# EAGLE board Lamp Logic Board_22 BRAIN (EAGLE 9.5.1)
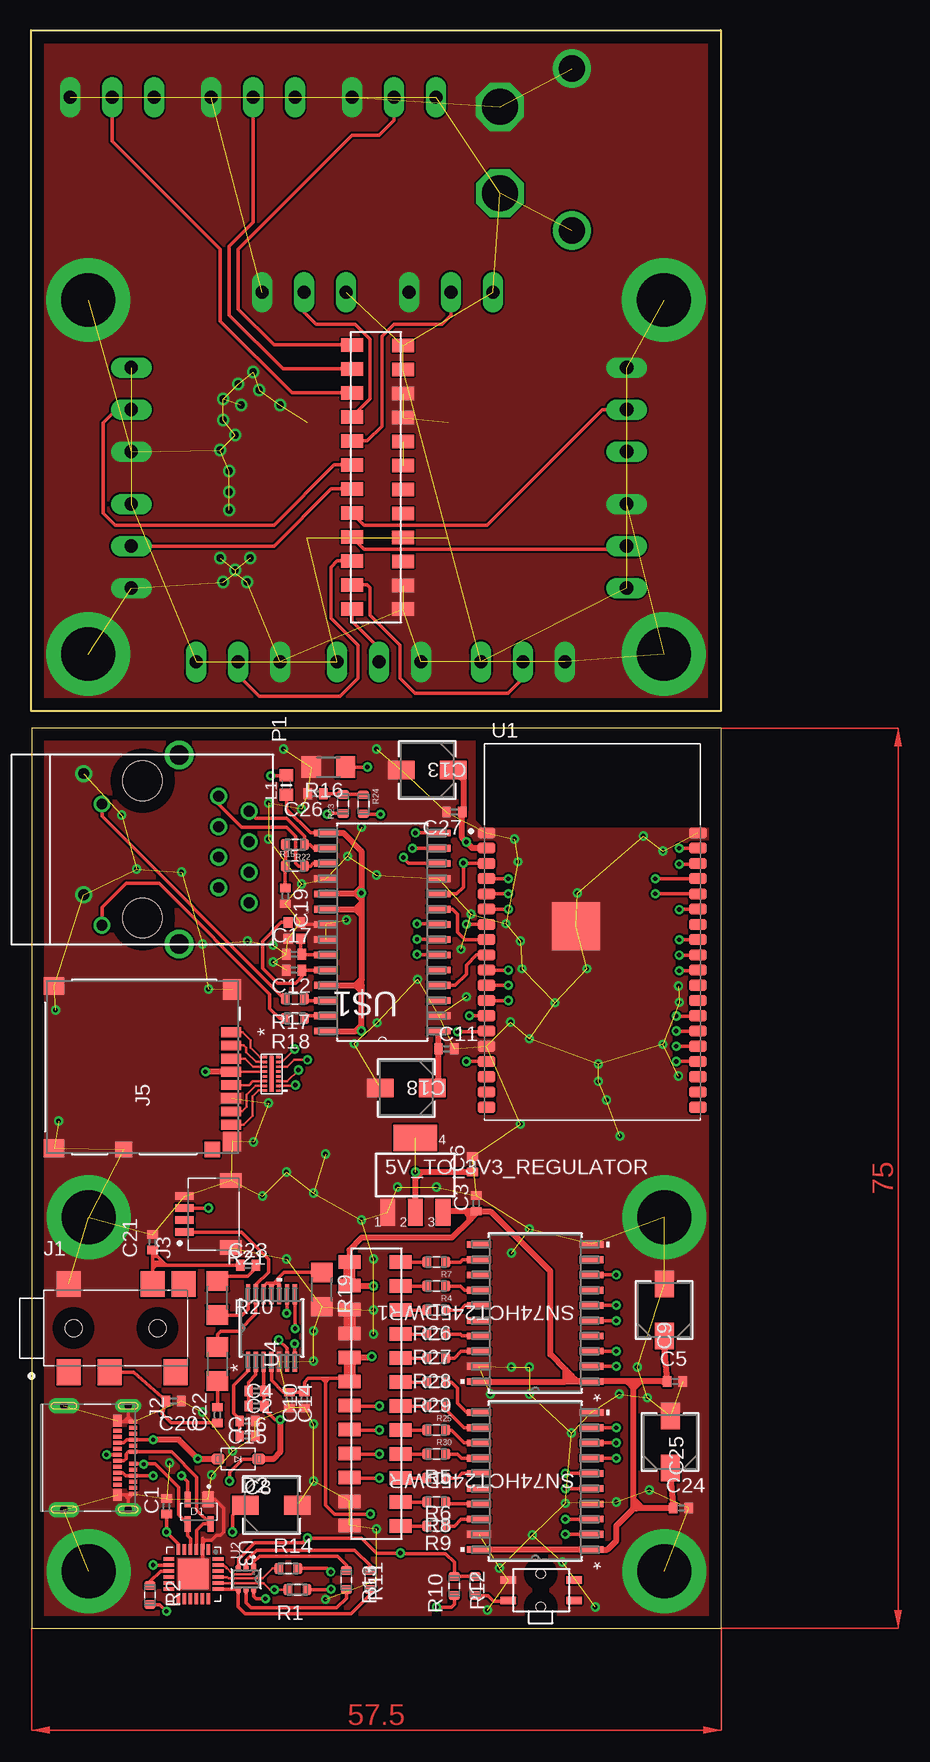
[diagram p0: board, top side]
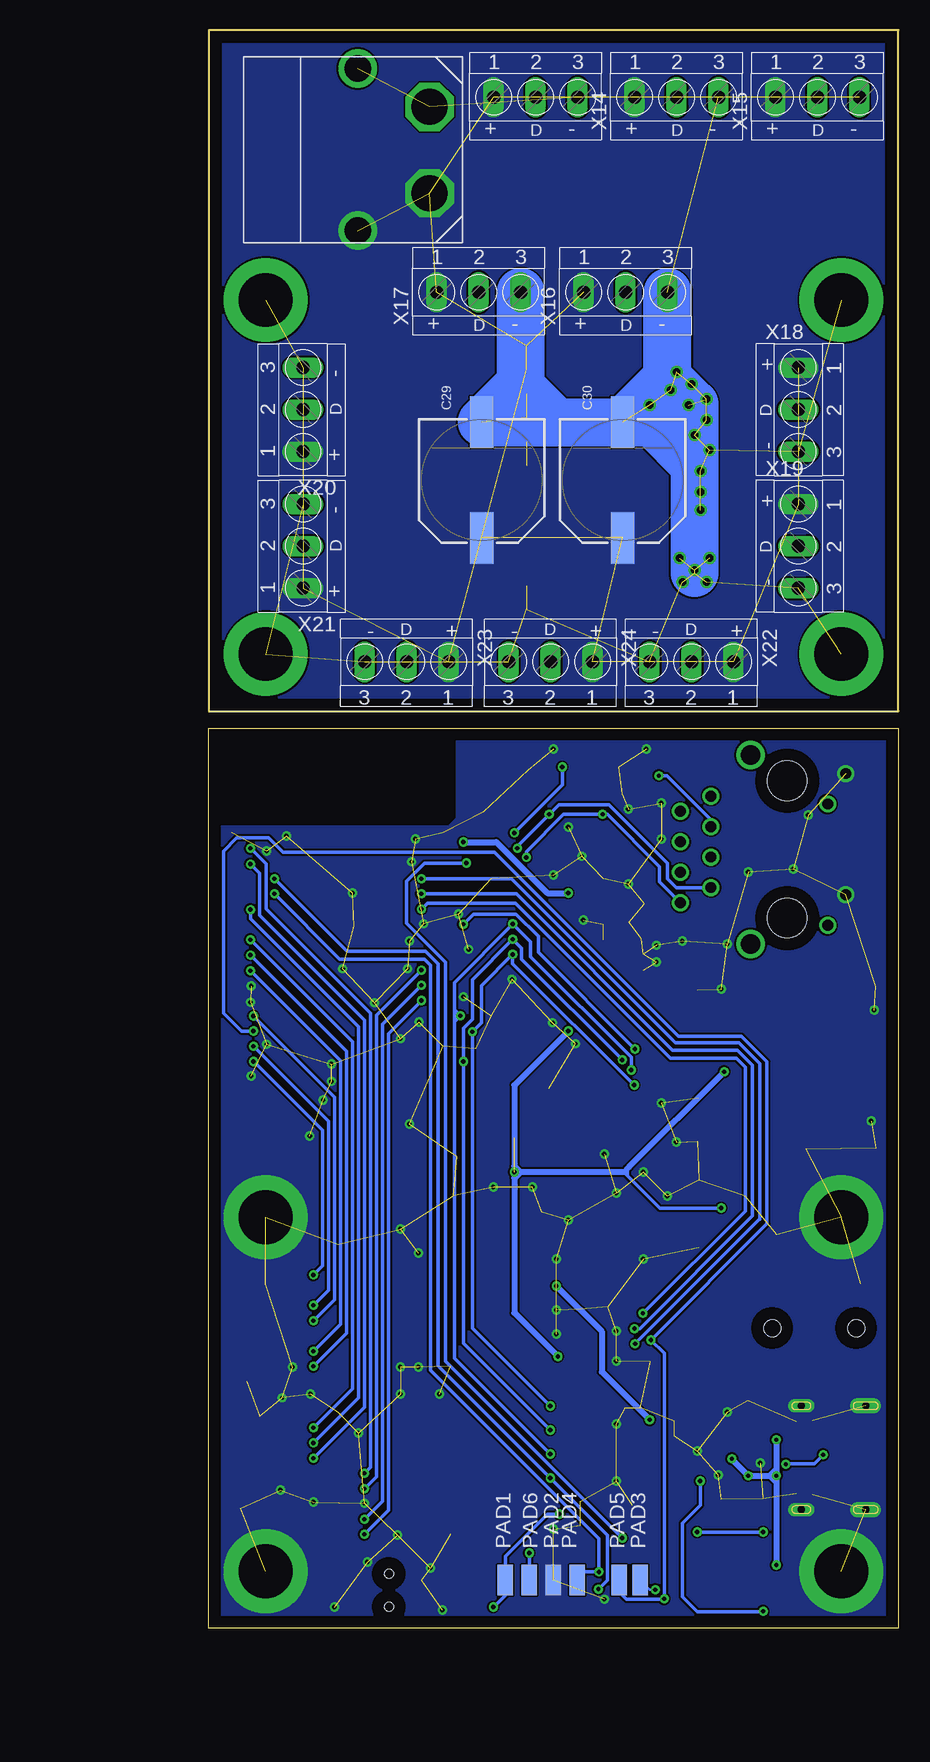
[diagram p1: board, bottom side, seen from below]

Size 57.54 x 133.17 mm. Coordinates in mm from the lower left corner, seen from the top.
Outline: 0.04,0 57.54,0 57.54,75 0.04,75 0.04,0
Outline: 0,76.42 0,133.17 57.5,133.17 57.5,76.42 0,76.42
Copper layers (1*16): Top 0.035mm / dielectric 1.5mm / Bottom 0.035mm
Design rules "default": minimum track width 6mil, minimum drill 0.35mm, track to track 6mil, track to pad 6mil, pad to pad 6mil, via to via 6mil, smd to smd 6mil, copper to edge 40mil, drill to drill 6mil, minimum pad ring 10mil, minimum via ring 8mil, stop-mask expansion 4mil, vias tented up to drill 0mil, thermal gap 10mil
Net classes: 1 LED Data: width 0.305 mm, drill 0.25 mm

## Footprints (pad centres in the part's own frame; a part is rotated, then mirrored left to right if it is on the bottom)
SOT223 = smd 1.219 x 2.235: 1 -2.311,-3.099; 2 0,-3.099; 3 2.311,-3.099 | smd 3.6 x 2.2: 4 0,3.099
C0402 = smd 0.7 x 0.9: 1 -0.65,0; 2 0.65,0
CAP_EEFC_B = smd 2.21 x 1.575: 1 -2.159,0; 2 2.159,0
CSV-G = smd 4.318 x 1.93: + -4.826,0; - 4.826,0
SOT143 = smd 0.99 x 1.3: 1 -0.76,-1.025 | smd 0.59 x 1.3: 2 0.96,-1.025; 3 0.96,1.025; 4 -0.96,1.025
SOD-123 = smd 1.02 x 0.86: A 1.68,0; C -1.68,0
CUI_SJ2-35894D-SMT-TR = smd 2 x 2.15: 1 -3.9,-3.675; 2 3.1,3.675; 3 -0.5,-3.675; 4 -3.9,3.675; 10 5.7,3.675; 11 5,-3.675 | hole 1.4: -3.5,0; 3.5,0
MOLEX_105450-0101 = smd 0.3 x 0.7: A1 -3,3.77; A2 -2.5,3.77; A3 -2,3.77; A4 -1.5,3.77; A5 -1,3.77; A6 -0.5,3.77; A7 0.5,3.77; A8 1,3.77; A9 1.5,3.77; A10 2,3.77; A11 2.5,3.77; A12 3,3.77; B2 2.25,2.47; B3 1.75,2.47; B4 1.25,2.47; B5 0.75,2.47; B6 0.25,2.47; B7 -0.25,2.47; B8 -0.75,2.47; B9 -1.25,2.47; B10 -1.75,2.47; B11 -2.25,2.47 | smd 1 x 0.7: B1 3.1,2.47; B12 -3.1,2.47 | drill 0.6 pad 1.1 long: S1 -4.32,3.36; S2 4.32,3.36 | drill 0.6 pad 1.3 long: S3 -4.32,-2; S4 4.32,-2
JST_SM04B-SRSS-TB(LF)(SN) = smd 0.6 x 1.55: 1 -1.5,0; 2 -0.5,0; 3 0.5,0; 4 1.5,0 | smd 1.2 x 1.8: S1 -2.8,-3.875; S2 2.8,-3.875
CON00218_8 = smd 0.813 x 1.676: 1 2.899,-7.387; 2 1.799,-7.387; 3 0.699,-7.387; 4 -0.401,-7.387; 5 -1.501,-7.387; 6 -2.601,-7.387; 7 -3.701,-7.387; 8 -4.801,-7.387 | smd 1.499 x 1.702: 9 -6.751,7.374; 10 6.751,7.374 | smd 1.295 x 1.397: 11 -6.859,1.577 | smd 1.295 x 1.295: 12 -6.859,-5.823 | smd 1.6 x 1.499: 13 -6.201,-7.476 | smd 1.702 x 1.499: 14 6.449,-7.476
L0603 = smd 1 x 1.1: 1 -0.794,0; 2 0.794,0
WIZNET_RB1-125BAG1A = drill 0.9: L1 6.325,-3.38; L2 3.784,-4.899; L3 -3.786,-3.379; L4 -6.325,-4.9 | drill 0.9 pad 1.3: R1 -4.446,6.349; R2 -3.176,8.889; R3 -1.906,6.349; R4 -0.636,8.889; R5 0.634,6.349; R6 1.904,8.889; R7 3.174,6.349; R8 4.444,8.889 | drill 1.6 pad 2.184: S1 -7.876,3.049; S2 7.874,3.049 | hole 3.3: 5.714,-0.001; -5.716,-0.001
SMD1,27-2,54 = smd 1.27 x 2.54: 1 0,0
RES_0603 = smd 0.74 x 0.93: 1 -0.795,0; 2 0.795,0
R1206 = smd 1.6 x 1.803: 1 -1.422,0; 2 1.422,0
DW20 = smd 1.981 x 0.559: 1 -4.686,5.715; 2 -4.686,4.445; 3 -4.686,3.175; 4 -4.686,1.905; 5 -4.686,0.635; 6 -4.686,-0.635; 7 -4.686,-1.905; 8 -4.686,-3.175; 9 -4.686,-4.445; 10 -4.686,-5.715; 11 4.686,-5.715; 12 4.686,-4.445; 13 4.686,-3.175; 14 4.686,-1.905; 15 4.686,-0.635; 16 4.686,0.635; 17 4.686,1.905; 18 4.686,3.175; 19 4.686,4.445; 20 4.686,5.715
XCVR_ESP32-WROVER-I = smd 1.45 x 0.93: 1 -8.81,8.26; 2 -8.81,6.99; 3 -8.81,5.72; 4 -8.81,4.45; 5 -8.81,3.18; 6 -8.81,1.91; 7 -8.81,0.64; 8 -8.81,-0.63; 9 -8.81,-1.9; 10 -8.81,-3.17; 11 -8.81,-4.44; 12 -8.81,-5.71; 13 -8.81,-6.98; 14 -8.81,-8.25; 15 -8.81,-9.52; 16 -8.81,-10.79; 17 -8.81,-12.06; 18 -8.81,-13.33; 19 -8.81,-14.6; 20 8.81,-14.6; 21 8.81,-13.33; 22 8.81,-12.06; 23 8.81,-10.79; 24 8.81,-9.52; 25 8.81,-8.25; 26 8.81,-6.98; 27 8.81,-5.71; 28 8.81,-4.44; 29 8.81,-3.17; 30 8.81,-1.9; 31 8.81,-0.63; 32 8.81,0.64; 33 8.81,1.91; 34 8.81,3.18; 35 8.81,4.45; 36 8.81,5.72; 37 8.81,6.99; 38 8.81,8.26 | smd 4 x 4: 39 -1.38,0.47
SILABS_CP2102N-A02-GQFN24R = smd 0.9 x 0.3: 1 -1.55,1.75; 2 -1.55,1.25; 3 -1.55,0.75; 4 -1.55,0.25; 5 -1.55,-0.25; 6 -1.55,-0.75; 13 2.55,-0.75; 14 2.55,-0.25; 15 2.55,0.25; 16 2.55,0.75; 17 2.55,1.25; 18 2.55,1.75 | smd 0.3 x 0.9: 7 -0.75,-1.55; 8 -0.25,-1.55; 9 0.25,-1.55; 10 0.75,-1.55; 11 1.25,-1.55; 12 1.75,-1.55; 19 1.75,2.55; 20 1.25,2.55; 21 0.75,2.55; 22 0.25,2.55; 23 -0.25,2.55; 24 -0.75,2.55 | smd 2.55 x 2.55: 25 0.5,0.5
SOT-363 = smd 0.6 x 0.42: 1 -0.95,0.65; 2 -0.95,0; 3 -0.95,-0.65; 4 0.95,-0.65; 5 0.95,0; 6 0.95,0.65
PW14 = smd 1.676 x 0.356: 1 -2.819,1.95; 2 -2.819,1.3; 3 -2.819,0.65; 4 -2.819,0; 5 -2.819,-0.65; 6 -2.819,-1.3; 7 -2.819,-1.95; 8 2.819,-1.95; 9 2.819,-1.3; 10 2.819,-0.65; 11 2.819,0; 12 2.819,0.65; 13 2.819,1.3; 14 2.819,1.95
SOIC127P1034X264-28N = smd 1.981 x 0.559: 1 -4.699,8.255; 2 -4.699,6.985; 3 -4.699,5.715; 4 -4.699,4.445; 5 -4.699,3.175; 6 -4.699,1.905; 7 -4.699,0.635; 8 -4.699,-0.635; 9 -4.699,-1.905; 10 -4.699,-3.175; 11 -4.699,-4.445; 12 -4.699,-5.715; 13 -4.699,-6.985; 14 -4.699,-8.255; 15 4.699,-8.255; 16 4.699,-6.985; 17 4.699,-5.715; 18 4.699,-4.445; 19 4.699,-3.175; 20 4.699,-1.905; 21 4.699,-0.635; 22 4.699,0.635; 23 4.699,1.905; 24 4.699,3.175; 25 4.699,4.445; 26 4.699,5.715; 27 4.699,6.985; 28 4.699,8.255
CM1624-08DE = smd 0.2 x 0.4: CLK 1.075,1.3; CMD 2.275,1.3; DATA0 0.675,1.3; DATA1 0.3,1.3; DATA2 3.075,1.3; DATA3 2.675,1.3; ESD1 1.475,1.3; ESD2 1.475,0.175; ESD3 1.875,0.175; SDCLK 1.075,0.175; SDCMD 2.275,0.175; SDDATA0 0.675,0.175; SDDATA1 0.275,0.175; SDDATA2 3.075,0.175; SDDATA3 2.675,0.175; VCC 1.875,1.3 | smd 3 x 0.35: GND 1.7,0.725
ECS-250-10-37B-CTN-TR = smd 0.85 x 0.75: 1 0.45,0.4; 2 1.8,0.4; 3 1.8,1.45; 4 0.45,1.45
QUICKFIT_RISER_THING = drill 4.5 pad 7: P$1 0,0
TL1014BF160QG = smd 1.27 x 0.635: P$1 0,0; P$2 5.5,0; P$3 0,-1.7; P$4 5.5,-1.7 | hole 0.75: 2.7,0.525; 2.7,-2.225
MY_HEADER = smd 1.12 x 1.83: P$1 -2,0; P$2 0.005,0; P$3 2.005,0; P$4 4.005,0; P$5 6.005,0; P$6 8.005,0; P$7 10.005,0; P$8 12.005,0; P$9 14.005,0; P$10 16.005,0; P$11 18.005,0; P$12 20.005,0; P$13 -2,-4.25; P$14 -0.045,-4.25; P$15 1.955,-4.25; P$16 3.955,-4.25; P$17 5.955,-4.25; P$18 7.955,-4.25; P$19 9.955,-4.25; P$20 11.955,-4.25; P$21 13.955,-4.25; P$22 15.955,-4.25; P$23 17.955,-4.25; P$24 19.955,-4.25
4,PIECE = drill 4.5 pad 7: P$1 0,0; P$2 48,29.5; P$3 0,29.5; P$4 48,0
XT60 = drill 3 octagon: + 4.1,2.75; - 11.3,2.75 | drill 2.184 pad 2.438: +_HOLE 1,8.75 | drill 2.184 pad 2.413: -_HOLE 14.5,8.75
TERMINAL-BLOCK-3-PIN-3.5MM-LONG-PAD = drill 1.1 pad 1.7 long: 1 -3.5,-0.1; 2 0,-0.1; 3 3.5,-0.1

## Placement (x,y rotation side)
5V_TO_3V3_REGULATOR  [SOT223]  32.04,37.75 0 top
C1  0.1uF  [C0402]  11.29,10.14 90 top
C2  1uF  [C0402]  18.79,18.5 0 top
C3  1uF  [C0402]  37.11,35.38 90 top
C4  0.1uF  [C0402]  18.79,19.75 0 top
C5  0.1uF  [C0402]  53.69,20.55 0 top
C6  1uF  [C0402]  36.8,38.63 90 top
C8  1uF  [CAP_EEFC_B]  20.04,10.25 0 top
C9  1uF  [CAP_EEFC_B]  52.79,26.5 90 top
C10  1uF  [C0402]  21.54,19 270 top
C11  10uF  [C0402]  34.62,48.26 0 top
C12  6pF  [C0402]  21.93,54.83 180 top
C13  100uF  [CAP_EEFC_B]  33.04,71.5 180 top
C14  0.1uF  [C0402]  22.79,19 270 top
C15  1uF  [C0402]  18.04,16 180 top
C16  0.1uF  [C0402]  18.04,17.25 180 top
C17  6pF  [C0402]  21.93,56.14 180 top
C18  100uF  [CAP_EEFC_B]  31.29,45 180 top
C19  0.1uF  [C0402]  21.19,61.01 270 top
C20  0.1uF  [C0402]  11.9,18.92 0 top
C21  0.1uF  [C0402]  10.13,32.14 90 top
C22  1uF  [C0402]  15.54,17.75 90 top
C23  1uF  [C0402]  18.09,30.22 0 top
C24  0.1uF  [C0402]  54.19,10 0 top
C25  1uF  [CAP_EEFC_B]  53.29,15.5 90 top
C26  0.1uF  [C0402]  23.71,69.53 180 top
C27  1uF  [C0402]  35.29,68 180 top
C29  [CSV-G]  34.75,95.67 90 bottom
C30  [CSV-G]  23,95.67 90 bottom
D1  SP0503BAHTG  [SOT143]  14,9.7 180 top
D2  STPS1L60ZFY  [SOD-123]  17.27,14.08 180 top
J1  SJ2-35894D-SMT-TR  [CUI_SJ2-35894D-SMT-TR]  7.04,25 0 top
J2  105450-0101  [MOLEX_105450-0101]  4.74,14.19 270 top
J3  SM04B-SRSS-TB(LF)(SN)  [JST_SM04B-SRSS-TB(LF)(SN)]  12.79,34.5 90 top
J5  LLC  [CON00218_8]  9.29,46.75 90 top
L1  EXC3BP  [L0603]  21.29,70.25 90 top
P1  RB1-125BAG1A  [WIZNET_RB1-125BAG1A]  9.29,64.88 270 top
PAD1  VCC  [SMD1,27-2,54]  32.79,4 0 bottom
PAD2  GND  [SMD1,27-2,54]  28.79,4 0 bottom
PAD3  TX  [SMD1,27-2,54]  21.54,4 0 bottom
PAD4  RX  [SMD1,27-2,54]  26.79,4 0 bottom
PAD5  DTR  [SMD1,27-2,54]  23.29,4 0 bottom
PAD6  RTS  [SMD1,27-2,54]  30.79,4 0 bottom
R1  330  [RES_0603]  22.21,3.2 180 top
R2  12k  [RES_0603]  9.91,2.75 270 top
R4  330  [RES_0603]  33.79,28.5 180 top
R5  330  [RES_0603]  33.79,14.5 180 top
R6  330  [RES_0603]  33.79,12.5 180 top
R7  330  [RES_0603]  33.79,30.5 180 top
R8  330  [RES_0603]  33.79,10.5 180 top
R9  330  [RES_0603]  33.79,8.5 180 top
R10  330  [RES_0603]  37.04,3.5 270 top
R11  12k  [RES_0603]  28.29,4 270 top
R12  12k  [RES_0603]  35.29,3.5 270 top
R13  12k  [RES_0603]  26.29,4 270 top
R14  330  [RES_0603]  21.45,4.97 0 top
R15  330  [RES_0603]  22.01,63.5 0 top
R16  2.32k  [R1206]  24.79,71.75 180 top
R17  330  [RES_0603]  22,52.44 180 top
R18  330  [RES_0603]  22,50.8 180 top
R19  10k  [R1206]  24.24,28.2 270 top
R20  75  [R1206]  15.54,22 90 top
R21  75  [R1206]  15.54,27.5 270 top
R22  330  [RES_0603]  22.01,65.28 180 top
R23  330  [RES_0603]  26.01,68.68 90 top
R24  330  [RES_0603]  27.71,68.65 270 top
R25  330  [RES_0603]  33.79,18.5 180 top
R26  330  [RES_0603]  33.79,26.5 180 top
R27  330  [RES_0603]  33.79,24.5 180 top
R28  330  [RES_0603]  33.79,22.5 180 top
R29  330  [RES_0603]  33.79,20.5 180 top
R30  330  [RES_0603]  33.79,16.5 180 top
SN74HCT245DWR  SN74HCT245DWR  [DW20]  42.04,12.25 180 top
SN74HCT245DWR1  SN74HCT245DWR  [DW20]  42.04,26.25 180 top
U1  ESP32-WROVER-IB  [XCVR_ESP32-WROVER-I]  46.79,58 0 top
U2  CP2102N-A02-GQFN24R  [SILABS_CP2102N-A02-GQFN24R]  13.04,5 270 top
U3  MMDT3904-7-F  [SOT-363]  17.92,4.09 270 top
U4  PCM1808PWR  [PW14]  20.04,25 90 top
U$1  ENC28J60/SO  [SOIC127P1034X264-28N]  29.29,58 180 top
U$2  CM1624-08DE  [CM1624-08DE]  20.79,44.5 90 top
U$3  ECS-250-10-37B-CTN-TR  [ECS-250-10-37B-CTN-TR]  21.04,59.25 270 top
U$4  QUICKFIT_RISER_THING  [QUICKFIT_RISER_THING]  4.79,4.75 0 top
U$5  QUICKFIT_RISER_THING  [QUICKFIT_RISER_THING]  4.79,34.25 0 top
U$6  QUICKFIT_RISER_THING  [QUICKFIT_RISER_THING]  52.79,34.25 0 top
U$7  TL1014BF160QG  [TL1014BF160QG]  39.79,4 0 top
U$8  QUICKFIT_RISER_THING  [QUICKFIT_RISER_THING]  52.79,4.75 0 top
U$9  MY_HEADER  [MY_HEADER]  30.79,28.5 270 top
U$13  POWERBOARD_TEMPLATEPOWERBOARD_TEMPLATE  [4,PIECE]  52.75,81.17 0 bottom
U$14  MY_HEADER  [MY_HEADER]  26.75,86.92 90 top
U$15  XT60  [XT60]  36.34,115.46 90 bottom
X13  TERMINAL-BLOCK-3.5MM-3-PIN-LONG-PAD  [TERMINAL-BLOCK-3-PIN-3.5MM-LONG-PAD]  30.25,127.67 0 bottom
X14  TERMINAL-BLOCK-3.5MM-3-PIN-LONG-PAD  [TERMINAL-BLOCK-3-PIN-3.5MM-LONG-PAD]  18.5,127.67 0 bottom
X15  TERMINAL-BLOCK-3.5MM-3-PIN-LONG-PAD  [TERMINAL-BLOCK-3-PIN-3.5MM-LONG-PAD]  6.75,127.67 0 bottom
X16  TERMINAL-BLOCK-3.5MM-3-PIN-LONG-PAD  [TERMINAL-BLOCK-3-PIN-3.5MM-LONG-PAD]  22.75,111.42 0 bottom
X17  TERMINAL-BLOCK-3.5MM-3-PIN-LONG-PAD  [TERMINAL-BLOCK-3-PIN-3.5MM-LONG-PAD]  35,111.42 0 bottom
X18  TERMINAL-BLOCK-3.5MM-3-PIN-LONG-PAD  [TERMINAL-BLOCK-3-PIN-3.5MM-LONG-PAD]  8.25,101.54 270 bottom
X19  TERMINAL-BLOCK-3.5MM-3-PIN-LONG-PAD  [TERMINAL-BLOCK-3-PIN-3.5MM-LONG-PAD]  8.25,90.17 270 bottom
X20  TERMINAL-BLOCK-3.5MM-3-PIN-LONG-PAD  [TERMINAL-BLOCK-3-PIN-3.5MM-LONG-PAD]  49.75,101.54 90 bottom
X21  TERMINAL-BLOCK-3.5MM-3-PIN-LONG-PAD  [TERMINAL-BLOCK-3-PIN-3.5MM-LONG-PAD]  49.75,90.17 90 bottom
X22  TERMINAL-BLOCK-3.5MM-3-PIN-LONG-PAD  [TERMINAL-BLOCK-3-PIN-3.5MM-LONG-PAD]  17.25,80.42 180 bottom
X23  TERMINAL-BLOCK-3.5MM-3-PIN-LONG-PAD  [TERMINAL-BLOCK-3-PIN-3.5MM-LONG-PAD]  41,80.42 180 bottom
X24  TERMINAL-BLOCK-3.5MM-3-PIN-LONG-PAD  [TERMINAL-BLOCK-3-PIN-3.5MM-LONG-PAD]  29,80.42 180 bottom

## Library data of the parts
5V_TO_3V3_REGULATOR = lm1117; MF: Texas Instruments; MPN: LM1117MP-1.8; OC_FARNELL: 1469053; OC_NEWARK: 41K3467
C1-C4 C6 C10-C12 C14-C17 C19 C22 C23 C26 C27 R16 R19-R21 = resistor
C5 C20 C21 C24 = adafruit
C8 C9 C13 C18 C25 = EEE-FC1V1R0R; MANUFACTURER_PART_NUMBER: EEEFC1V1R0R; VENDOR: Panasonic
C29 C30 = rc-master-smd
D1 = SP0503BAHTG; DESCRIPTION: SP050xBA Series 8 V 30 pF Uni-Directional SMT TVS Avalanche Diode Array SOT-143; DIGI-KEY_PART_NUMBER: F2715CT-ND; DIGI-KEY_PURCHASE_URL: https://www.digikey.com/product-detail/en/littelfuse-inc/SP0503BAHTG/F2715CT-ND/1154322?utm_source=snapeda&utm_medium=aggregator&utm_campaign=symbol; MF: Littelfuse Inc.; MP: SP0503BAHTG; PACKAGE: SOT-143 Littelfuse
D2 = Diodes; CREATED_BY: PCBLayout.com; DIGIKEY_PART_NUMBER: MBR0520LT1GOSTR-ND; MANUFACTURER: ON Semiconductor; MPN: MBR0520LT1G; PACKAGE: SOD-123
J1 = SJ2-35894D-SMT-TR; CUI_PURCHASE_URL: https://www.cui.com/product/interconnect/connectors/audio-connectors/jacks/sj2-3589x-smt-series?utm_source=snapeda.com&utm_medium=referral&utm_campaign=snapedaBOM; DESCRIPTION: 3.5 mm, Stereo, Right Angle, Surface Mount _SMT_, Audio Jack Connector; DIGI-KEY_PART_NUMBER: CP-SJ2-35894D-SMT-CT-ND; DIGI-KEY_PURCHASE_URL: https://www.digikey.com/product-detail/en/cui-inc/SJ2-35894D-SMT-TR/CP-SJ2-35894D-SMT-CT-ND/6619623?utm_source=snapeda&utm_medium=aggregator&utm_campaign=symbol; MF: CUI Inc.; MP: SJ2-35894D-SMT-TR; PACKAGE: None
J2 = 105450-0101; DESCRIPTION: USB Shielded I/O Receptacle; Type C; Right Angle; Surface Mount; Gold over Nickel; DIGI-KEY_PART_NUMBER: WM12856CT-ND; DIGI-KEY_PURCHASE_URL: https://www.digikey.com/product-detail/en/molex/1054500101/WM12856CT-ND/5843891?utm_source=snapeda&utm_medium=aggregator&utm_campaign=symbol; MF: Molex; MP: 1054500101; PACKAGE: None
J3 = SM04B-SRSS-TB_LF__SN_; AVAILABILITY: Unavailable; DESCRIPTION: SH Series 1.0 mm Pitch 2 Position Single Row Side Entry Shrouded Header; MF: JST Sales; MP: SM04B-SRSS-TB_LF__SN_; PACKAGE: None; PRICE: None
J5 = 5027740891; MANUFACTURER_PART_NUMBER: LLC; VENDOR: Molex Connector Corporation
L1 = ferrite
P1 = RB1-125BAG1A; AVAILABILITY: Unavailable; DESCRIPTION: Accessory RJ-45 With Transformer Connector - UDE; MF: WIZnet; MP: RB1-125BAG1A; PACKAGE: HVQFN-36 NXP Semiconductors; PRICE: None
PAD1-PAD6 = wirepad
R1 R2 R4-R15 R17 R18 R22-R30 = Resistor_Capacitor; CREATED_BY: PCBLayout.com; DIGIKEY_PART_NUMBER: 311-0.0GRTR-ND; MANUFACTURER: Yageo; MPN: RC0603JR-070RL; PACKAGE: SMD 0603
SN74HCT245DWR SN74HCT245DWR1 = SN74HCT245DWR ; MANUFACTURER_PART_NUMBER: SN74HCT245DWR; VENDOR: Texas Instruments
U1 = ESP32-WROVER-I; AVAILABILITY: Unavailable; DESCRIPTION: Module: combo; GPIO, I2C x2, I2S x2, SDIO, SPI x3, UART x3; U.FL; MF: Espressif Systems; MP: ESP32-WROVER-I; PACKAGE: Module Espressif Systems; PRICE: None
U2 = CP2102N-A02-GQFN20R
U3 = MMDT3904; MANUFACTURER_PART_NUMBER: MMDT39047F; VENDOR: Diodes Inc
U4 = PCM1808PWR; MANUFACTURER_PART_NUMBER: PCM1808PWR; VENDOR: Texas Instruments
U$1 = ENC28J60_SO; DESCRIPTION: ENC28J60 Series 3.3 V Stand-Alone Ethernet Controller with SPI Interface-SSOP-28; DIGI-KEY_PART_NUMBER: ENC28J60/SS-ND; DIGI-KEY_PURCHASE_URL: https://www.digikey.com/product-detail/en/microchip-technology/ENC28J60-SS/ENC28J60-SS-ND/857584?utm_source=snapeda&utm_medium=aggregator&utm_campaign=symbol; MF: Microchip; MP: ENC28J60/SS; PACKAGE: SSOP-28 Microchip
U$2 = CM1624-08DE
U$3 = ECS-250-10-37B-CTN-TR
U$4-U$6 U$8 U$13 = QUICKFIT_RISER_THING
U$7 = TL1014BF160QG
U$9 U$14 = MY_HEADER
U$15 = XT60
X13-X24 = Rembrandt Electronics - Terminal Block 3-5mm v1-0

## Nets
BCK [LED Data]: U1.5 U4.8
CT [LED Data]: L1.2 P1.R3
D+ [LED Data]: D1.4 J2.A6 J2.B6 U2.3
D- [LED Data]: D1.3 J2.A7 J2.B7 U2.4
DOUT [LED Data]: U1.6 U4.9
DTR [LED Data]: R13.1 U2.23 U3.1
EN [LED Data]: PAD6.1 R10.1 R12.1 U1.3 U3.3 U$1.10
ETHER_CS [LED Data]: U1.8 U$1.9
ETHER_INT [LED Data]: U1.9 U$1.4
GND: 5V_TO_3V3_REGULATOR.1 C1.2 C3.2 C5.2 C6.2 C8.2 C9.2 C10.2 C11.2 C12.2 C13.2 C14.2 C15.1 C16.1 C17.2 C18.2 C19.2 C20.2 C21.2 C24.2 C25.2 C26.2 C27.2 D1.1 J1.4 J2.A1 J2.A12 J2.B1 J2.B12 J2.S1 J2.S2 J2.S3 J2.S4 J3.4 J3.S1 J3.S2 J5.6 J5.9 J5.10 J5.11 J5.13 J5.14 P1.L2 P1.L4 PAD2.1 R16.2 R19.2 SN74HCT245DWR1.10 SN74HCT245DWR1.19 SN74HCT245DWR.10 SN74HCT245DWR.19 U1.1 U1.15 U1.38 U1.39 U2.2 U2.25 U4.5 U$1.2 U$1.11 U$1.18 U$1.21 U$1.22 U$3.2 U$3.4 U$4.P$1 U$5.P$1 U$6.P$1 U$7.P$1 U$8.P$1 U$9.P$15 U$9.P$16 U$9.P$23 U$9.P$24
GND_BRD: C29.- C30.- U$13.P$1 U$13.P$2 U$13.P$3 U$13.P$4 U$14.P$13 U$14.P$14 U$14.P$21 U$14.P$22 U$15.- U$15.-_HOLE X13.3 X14.3 X15.3 X16.3 X17.3 X18.3 X19.3 X20.3 X21.3 X22.3 X23.3 X24.3
HEADER_CS [LED Data]: R1.1 U1.35 U$9.P$22
HEADER_CS_BRD: U$14.P$15
LEDA [LED Data]: P1.L1 R18.2
LEDB [LED Data]: P1.L3 R17.2
LEDS1_3V3 [LED Data]: SN74HCT245DWR1.8 U1.23
LEDS1_5V [LED Data]: R7.2 U$9.P$1
LEDS1_5V_BRD: U$14.P$12 X13.2
LEDS2_3V3 [LED Data]: SN74HCT245DWR1.6 U1.24
LEDS2_5V [LED Data]: R4.2 U$9.P$2
LEDS2_5V_BRD: U$14.P$11 X14.2
LEDS3_3V3 [LED Data]: SN74HCT245DWR1.5 U1.26
LEDS3_5V [LED Data]: R26.2 U$9.P$3
LEDS3_5V_BRD: U$14.P$10 X15.2
LEDS4_3V3 [LED Data]: SN74HCT245DWR1.3 U1.29
LEDS4_5V [LED Data]: R27.2 U$9.P$4
LEDS4_5V_BRD: U$14.P$9 X16.2
LEDS5_3V3 [LED Data]: SN74HCT245DWR1.2 U1.30
LEDS5_5V [LED Data]: R28.2 U$9.P$5
LEDS5_5V_BRD: U$14.P$8 X17.2
LEDS6_3V3 [LED Data]: SN74HCT245DWR.9 U1.31
LEDS6_5V [LED Data]: R29.2 U$9.P$6
LEDS6_5V_BRD: U$14.P$7 X18.2
LEDS7_3V3 [LED Data]: SN74HCT245DWR.8 U1.33
LEDS7_5V [LED Data]: R25.2 U$9.P$7
LEDS7_5V_BRD: U$14.P$6 X19.2
LEDS8_3V3 [LED Data]: SN74HCT245DWR.7 U1.36
LEDS8_5V [LED Data]: R30.2 U$9.P$8
LEDS8_5V_BRD: U$14.P$5 X20.2
LEDS9_3V3 [LED Data]: SN74HCT245DWR.6 U1.37
LEDS9_5V [LED Data]: R5.2 U$9.P$9
LEDS9_5V_BRD: U$14.P$4 X21.2
LEDS10_3V3 [LED Data]: SN74HCT245DWR.5 U1.10
LEDS10_5V [LED Data]: R6.2 U$9.P$10
LEDS10_5V_BRD: U$14.P$3 X22.2
LEDS11_3V3 [LED Data]: SN74HCT245DWR.3 U1.11
LEDS11_5V [LED Data]: R8.2 U$9.P$11
LEDS11_5V_BRD: U$14.P$2 X23.2
LEDS12_3V3 [LED Data]: SN74HCT245DWR.2 U1.12
LEDS12_5V [LED Data]: R9.2 U$9.P$12
LEDS12_5V_BRD: U$14.P$1 X24.2
LEFT_CHANNEL [LED Data]: R21.2 U4.14
LRCK [LED Data]: U1.4 U4.7
MIC [LED Data]: J1.1
MISO [LED Data]: U1.14 U$1.6 U$2.SDDATA0 U$9.P$19
MISO_BRD: U$14.P$18
MOSI [LED Data]: U1.16 U$1.7 U$2.SDCMD U$9.P$20
MOSI_BRD: U$14.P$17
N$1 [LED Data]: R9.1 SN74HCT245DWR.18
N$2 [LED Data]: C2.1 C4.1 U4.2
N$3 [LED Data]: C20.1 C22.1 J1.3
N$4 [LED Data]: C21.1 C23.1 J1.2
N$5 [LED Data]: C1.1 C8.1 U2.6
N$6 [LED Data]: R7.1 SN74HCT245DWR1.12
N$7 [LED Data]: R11.1 U3.2
N$8 [LED Data]: R13.2 U3.5
N$9: R10.2 U$7.P$3
N$10 [LED Data]: R28.1 SN74HCT245DWR1.18
N$11 [LED Data]: R6.1 SN74HCT245DWR.15
N$12 [LED Data]: R5.1 SN74HCT245DWR.14
N$13 [LED Data]: R27.1 SN74HCT245DWR1.17
N$14 [LED Data]: R8.1 SN74HCT245DWR.17
N$15 [LED Data]: R26.1 SN74HCT245DWR1.15
N$16 [LED Data]: C22.2 R20.1
N$17 [LED Data]: C15.2 C16.2 U4.1
N$18 [LED Data]: R14.1 U2.21
N$19 [LED Data]: C11.1 C18.1 U$1.1
N$20 [LED Data]: R16.1 U$1.14
N$21 [LED Data]: C12.1 U$1.24 U$3.1
N$22 [LED Data]: C17.1 U$1.23 U$3.3
N$23 [LED Data]: R17.1 U$1.26
N$24 [LED Data]: C23.2 R21.1
N$25 [LED Data]: R18.1 U$1.27
N$26 [LED Data]: R29.1 SN74HCT245DWR.11
N$27 [LED Data]: R4.1 SN74HCT245DWR1.14
N$28 [LED Data]: R2.1 U2.9
N$30 [LED Data]: R19.1 U4.10 U4.11 U4.12
N$31 [LED Data]: C26.1 R23.2 R24.1
N$32 [LED Data]: C19.1 R15.1 R22.2
N$34 [LED Data]: R30.1 SN74HCT245DWR.13
N$35 [LED Data]: R25.1 SN74HCT245DWR.12
RIGHT_CHANNEL [LED Data]: J3.1 R20.2 U4.13
RIGHT_GAIN [LED Data]: J3.2
RTS [LED Data]: R11.2 U2.19 U3.4
RX0 [LED Data]: PAD4.1 R14.2 U1.34
SCK [LED Data]: U1.13 U$1.8 U$2.SDCLK U$9.P$21
SCK_BRD: U$14.P$16
SCKI [LED Data]: PAD5.1 U1.25 U3.6 U4.6
SD_CMD [LED Data]: J5.3 U$2.CMD
SD_CS [LED Data]: U1.7 U$2.SDDATA3
SD_D0 [LED Data]: J5.7 U$2.DATA0
SD_D1 [LED Data]: J5.8 U$2.DATA1
SD_D2 [LED Data]: J5.1 U$2.DATA2
SD_D3 [LED Data]: J5.2 U$2.DATA3
SD_SCK [LED Data]: J5.5 U$2.CLK
TPIN+ [LED Data]: P1.R7 R24.2 U$1.13
TPIN- [LED Data]: P1.R8 R23.1 U$1.12
TPOUT+ [LED Data]: P1.R1 R15.2 U$1.17
TPOUT- [LED Data]: P1.R2 R22.1 U$1.16
TX_CONTROLLER [LED Data]: PAD3.1 R1.2 U2.20
VDD3V3: 5V_TO_3V3_REGULATOR.2 5V_TO_3V3_REGULATOR.4 C6.1 C10.1 C13.1 C14.1 C27.1 J3.3 J5.4 L1.1 PAD1.1 R12.2 U1.2 U4.4 U$1.15 U$1.19 U$1.20 U$1.25 U$1.28 U$2.VCC U$9.P$17 U$9.P$18
VDD3V3_BRD: U$14.P$19 U$14.P$20
VDD5V: 5V_TO_3V3_REGULATOR.3 C2.2 C3.1 C4.2 C5.1 C9.1 C24.1 C25.1 D2.C R2.2 SN74HCT245DWR1.1 SN74HCT245DWR1.20 SN74HCT245DWR.1 SN74HCT245DWR.20 U4.3 U$9.P$13 U$9.P$14
VDD5V_BRD: C29.+ C30.+ U$14.P$23 U$14.P$24 U$15.+ U$15.+_HOLE X13.1 X14.1 X15.1 X16.1 X17.1 X18.1 X19.1 X20.1 X21.1 X22.1 X23.1 X24.1
VDD5VUSB: D1.2 D2.A J2.A4 J2.A9 J2.B4 J2.B9 U2.8
VREGIN [LED Data]: U2.7

## Tracks (layer width: path | path; a pad name or v marks a point on that pad's centre or on a via)
BCK  (via drill 0.35)
  Top 0.305: U1.5 v39.79,61.18 | v22.01,24.95 22.01,27.79 U4.8
  Bottom 0.305: v39.79,61.18 31.87,61.18 18.84,48.15 13.44,48.15 12.18,46.9 12.18,34.35 21.58,24.95 v22.01,24.95
CT  (via drill 0.35 pad 0.4)
  Top 0.305: L1.2 v19.97,71.03
  Bottom 0.305: P1.R3 15.63,67.35 19.32,71.03 v19.97,71.03
D+
  Top 0.305: U2.3 13.79,8.13 14.33,8.68 D1.4 13.82,9.82 13.82,12.57 11.7,14.69 J2.A6 8.1,14.69 7.91,14.5 7.91,14.12 7.73,13.94 J2.B6
D-  (via drill 0.35)
  Top 0.305: U2.4 13.29,7.43 13.04,7.68 D1.3 12.29,9.43 12.29,11.74 10.35,13.69 J2.A7 9.35,13.69 v9.39,13.65 | J2.B7 v6.29,14.44
  Bottom 0.305: v6.29,14.44 7.04,13.69 9.35,13.69 v9.39,13.65
DOUT  (via drill 0.35)
  Top 0.305: U1.6 v39.79,59.91 | U4.9 21.36,27.8 21.36,26.28 v21.31,26.23
  Bottom 0.305: v39.79,59.91 39.29,60.41 31.95,60.41 19.04,47.5 13.54,47.5 12.79,46.75 12.79,34.75 v21.31,26.23
DTR
  Top 0.2: 16.29,5 | U2.23 16.04,5.25 16.29,5 | 16.29,5 16.81,4.48 18.36,4.48 18.57,4.69 U3.1
  Top 0.305: U3.1 18.57,5.54 19.03,6 25.54,6 26.29,5.25 R13.1
EN  (via drill 0.35, 0.35 pad 0.4)
  Top 0.305: U$1.10 35.46,61.17 36.04,61.75 v36.04,63.75 36.07,63.72 U1.3 | U3.3 17.29,5.05 17.29,5.75 18.64,7.1 22.64,7.1 v23.04,7.5 27.54,7.5 28.79,6.25 v30.79,6.25 30.83,6.21 34.56,6.21 35.29,5.49 R12.1 R10.1
  Bottom 0.305: v23.04,7.5 37.79,22.25 37.79,55.5 41.04,58.75 41.04,62.21 39.5,63.75 v36.04,63.75 | PAD6.1 v30.79,6.25
ETHER_CS
  Top 0.305: U$1.9 35.13,59.91 35.54,59.5 35.54,58 36.17,57.37 U1.8
ETHER_INT
  Top 0.305: U$1.4 35.34,53.55 36.29,54.5 36.29,55.25 37.14,56.1 U1.9
GND  (via drill 0.35, 0.35 pad 0.4)  (153 unrouted)
  Top 0.305: U$1.21 22.65,58.63 U$3.4 | 8.1,10.78 J2.A12 8.41,11.09 J2.B1 7.79,11.09 8.1,10.78 | 8.1,10.78 J2.S2 | 8.04,17.19 J2.A1 8.1,17.6 | 8.04,17.19 7.79,17.19 | 7.79,17.19 7.31,17.19 J2.B12 | 8.1,17.6 J2.S1 | 8.04,17.54 7.79,17.29 7.79,17.19 | 8.1,17.6 8.04,17.54 | 8.04,17.54 8.04,17.19 | U2.2 14.29,5.25 U2.25 | U2.2 14.29,7.5 | U2.2 14.33,6.59 14.33,7.13 14.51,7.3 15.04,7.3 15.49,7.75 15.79,7.75 16.04,8 16.04,10 15.31,10.73 D1.1
  Top 1.016: U$9.P$15 U$9.P$16
  other vias: 24.54,39.5 22.54,62 20.19,56.9 20.19,55.5 40.04,21.75 41.54,21.75 41.54,19.5 38.29,19.5 40.94,54.95 46.34,54.95 43.69,52.1 47.29,47 47.29,45.55 53.99,53.5 54.04,52.15 40.59,63.85 40.79,57.25 52.69,64.75 39.59,58.7 35.84,56.55 36.69,59.5 36.29,52.6 39.99,50.5 41.54,49.1 47.99,44 52.69,48.65 53.99,46 49.09,41 32.24,54.05 28.84,50.45 26.94,48.7 40.04,31.25 41.54,33.25 2.04,51.5 2.29,42.25 14.79,53.25 18.54,40.5 51.04,66 40.29,65.75 28.79,73.25 21.04,73.25 27.54,66.75 28.79,62.75 23.54,36.25 24.54,2.4 48.79,10.5 44.54,10.4 39.04,5 44.29,5.5 47.04,1.75 38.04,1.5 28.54,24.5 28.54,26.5 23.54,24.75 23.54,22.25 27.54,34 21.29,30.75 28.54,30.75 33.79,36.75 30.54,36.75 23.54,17 23.54,12.25 15.04,12.75 26.39,64.3 7.54,67.75 8.79,63.25 18.04,57.25 12.54,63 14.29,57 19.79,43.75 19.29,36 21.29,38 51.54,11.5 49.04,19.5 51.39,19.2 50.54,21.75 14.29,18 16.79,14.75 26.29,59 19.79,65.75 19.79,68.75 22.54,68.25 45.54,61.25 40.79,42 41.79,7.75 45.04,16.25 28.79,8.25 11.54,13.75
  pour Top (isolate 0.16, no thermals): -0.46,75.25 36.79,75.25 36.79,67.25 37.54,66.5 60.79,66.5 60.79,-2.5 -0.46,-2.5
  pour Bottom (no thermals): 36.29,75 36.04,75.25 -0.46,75.25 -0.46,-3.75 59.79,-3.75 59.79,66.75 37.54,66.75 36.79,67.5 36.79,75
GND_BRD  (via drill 0.6)  (37 unrouted)
  Bottom 4: X17.3 31.5,103.74 | 31.5,103.74 C29.- 28.5,100.49 | 28.5,100.49 C30.- | 31.5,103.74 31.5,103.49 28.5,100.49 | C30.- 19.25,104.24 | 19.25,104.24 X16.3 | 19.25,104.24 17,101.99 17,96.92 | 17,96.92 17,87.92 | C30.- 20.58,100.49 17,96.92
  other vias: 18.25,89.17 15.75,89.17 17,88.17 16,87.17 18,87.17 16,102.42 17.25,103.67 16,100.67 17.5,101.92 19,103.17 18.5,104.67 17,99.42 15.75,98.17 20.75,101.92 16.5,93.17 16.5,94.67 16.5,96.42
  pour Top (no thermals): 57.5,133.17 0,133.17 0,76.42 57.5,76.42
HEADER_CS  (via drill 0.35 pad 0.4)
  Top 0.305: U1.35 v52.04,62.45 | v29.04,12.5 26.6,12.5 U$9.P$22 | v25.02,3.25 24.97,3.2 R1.1
  Bottom 0.305: v52.04,62.45 45.99,56.4 39.44,56.4 38.39,55.35 38.39,21.85 v29.04,12.5 24.29,7.75 24.29,3.98 v25.02,3.25
LEDA
  Top 0.305: R18.2 20.71,50.8 19.9,51.61 19.9,52.8 10.66,62.05 7.91,62.05 5.91,60.05 P1.L1
LEDB
  Top 0.305: R17.2 21.1,52.44 5.91,67.63 P1.L3
LEDS1_3V3  (via drill 0.35 pad 0.4)
  Top 0.305: U1.23 v53.79,47.21 | SN74HCT245DWR1.8 v48.79,29.43
  Bottom 0.305: v53.79,47.21 48.04,41.46 48.04,30.18 v48.79,29.43
LEDS1_5V
  Top 0.305: U$9.P$1 R7.2
LEDS1_5V_BRD
  Top 0.305: U$14.P$12 20.24,106.92 17.25,109.92 17.25,114.92 26.75,124.42 29,124.42 30.25,125.67 X13.2
LEDS2_3V3  (via drill 0.35 pad 0.4)
  Top 0.305: U1.24 v53.79,48.48 | SN74HCT245DWR1.6 v48.79,26.89
  Bottom 0.305: v53.79,48.48 47.54,42.23 47.54,28.14 v48.79,26.89
LEDS2_5V
  Top 0.305: R4.2 U$9.P$2
LEDS2_5V_BRD
  Top 0.305: U$14.P$11 20.99,104.92 16.5,109.42 16.5,115.17 18.5,117.17 X14.2
LEDS3_3V3  (via drill 0.35 pad 0.4)
  Top 0.305: SN74HCT245DWR1.5 v48.79,25.61 | v53.79,51 55.58,51 U1.26
  Bottom 0.305: v53.79,51 47.04,44.25 47.04,27.36 v48.79,25.61
LEDS3_5V
  Top 0.305: R26.2 U$9.P$3
LEDS3_5V_BRD
  Top 0.305: U$14.P$10 21.74,102.92 15.75,108.92 15.75,114.92 6.75,123.92 X15.2
LEDS4_3V3  (via drill 0.35 pad 0.4)
  Top 0.305: SN74HCT245DWR1.3 v48.79,23.07 | v54.04,54.77 55.54,54.77 U1.29
  Bottom 0.305: v54.04,54.77 46.54,47.27 46.54,25.32 v48.79,23.07
LEDS4_5V
  Top 0.305: R27.2 U$9.P$4
LEDS4_5V_BRD
  Top 0.305: U$14.P$9 28.25,102.42 28.25,107.42 27,108.67 23.75,108.67 22.75,109.67 X16.2
LEDS5_3V3  (via drill 0.35 pad 0.4)
  Top 0.305: SN74HCT245DWR1.2 v48.79,21.8 | v54.04,56.08 55.58,56.08 U1.30
  Bottom 0.305: v54.04,56.08 46.04,48.08 46.04,24.55 v48.79,21.8
LEDS5_5V
  Top 0.305: R28.2 U$9.P$5
LEDS5_5V_BRD
  Top 0.305: U$14.P$8 28,98.92 29.25,100.17 29.25,107.67 30.25,108.67 34.25,108.67 35,109.42 X17.2
LEDS6_3V3  (via drill 0.35 pad 0.4)
  Top 0.305: 46.66,16.64 SN74HCT245DWR.9 v48.79,16.7 | U1.31 54.06,57.37 v54.04,57.35
  Bottom 0.305: v54.04,57.35 45.54,48.85 45.54,19.95 v48.79,16.7
LEDS6_5V
  Top 0.305: U$9.P$6 R29.2
LEDS6_5V_BRD
  Top 0.305: X18.2 7.1,101.54 6,100.44 6,92.92 7,91.92 20.25,91.92 25.25,96.92 U$14.P$7
LEDS7_3V3  (via drill 0.35 pad 0.4)
  Top 0.305: 46.65,15.49 SN74HCT245DWR.8 v48.79,15.43 | v54.04,59.87 54.08,59.91 U1.33
  Bottom 0.305: v54.04,59.87 54.04,59.12 45.04,50.12 45.04,19.18 v48.79,15.43
LEDS7_5V
  Top 0.305: R25.2 U$9.P$7
LEDS7_5V_BRD
  Top 0.305: X19.2 20.25,90.17 25,94.92 U$14.P$6
LEDS8_3V3  (via drill 0.35 pad 0.4)
  Top 0.305: 46.66,14.1 SN74HCT245DWR.7 v48.79,14.15 | v54.04,63.66 55.54,63.66 U1.36
  Bottom 0.305: v54.04,63.66 53.29,62.91 53.29,59.41 44.54,50.66 44.54,18.41 v48.79,14.15
LEDS8_5V
  Top 0.305: R30.2 U$9.P$8
LEDS8_5V_BRD
  Top 0.305: U$14.P$5 27.75,91.92 38,91.92 47.62,101.54 X20.2
LEDS9_3V3  (via drill 0.35 pad 0.4)
  Top 0.305: SN74HCT245DWR.6 v44.54,12.88 | v54.04,64.97 55.58,64.97 U1.37
  Bottom 0.305: v54.04,64.97 52.74,63.67 52.74,59.92 44.04,51.22 44.04,13.38 v44.54,12.88
LEDS9_5V
  Top 0.305: R5.2 U$9.P$9
LEDS9_5V_BRD
  Top 0.305: U$14.P$4 27.75,89.92 49.4,89.92 X21.2
LEDS10_3V3  (via drill 0.35 pad 0.4)
  Top 0.305: SN74HCT245DWR.5 v44.54,11.62 | U1.10 v39.79,54.83
  Bottom 0.305: v39.79,54.83 43.53,51.08 43.53,12.62 v44.54,11.62
LEDS10_5V
  Top 0.305: R6.2 U$9.P$10
LEDS10_5V_BRD
  Top 0.305: U$14.P$3 25.5,88.92 25,88.42 25,84.17 27.25,81.92 27.25,79.17 25.75,77.67 19,77.67 17.25,79.42 X22.2
LEDS11_3V3  (via drill 0.35 pad 0.4)
  Top 0.305: SN74HCT245DWR.3 v44.54,9.07 | U1.11 v39.79,53.56
  Bottom 0.305: v39.79,53.56 43.04,50.31 43.04,10.57 v44.54,9.07
LEDS11_5V
  Top 0.305: U$9.P$11 R8.2
LEDS11_5V_BRD
  Top 0.305: X23.2 41,79.17 39.75,77.92 32,77.92 30.75,79.17 30.75,81.92 28.25,84.42 28.25,86.67 28,86.92 U$14.P$2
LEDS12_3V3  (via drill 0.35 pad 0.4)
  Top 0.305: SN74HCT245DWR.2 v44.54,7.8 | U1.12 v39.79,52.29
  Bottom 0.305: v44.54,7.8 42.54,9.8 42.54,49.54 v39.79,52.29
LEDS12_5V
  Top 0.305: R9.2 U$9.P$12
LEDS12_5V_BRD
  Top 0.305: U$14.P$1 26.75,83.92 29,81.67 X24.2
LEFT_CHANNEL
  Top 0.305: R21.2 17.61,26.08 18.09,26.55 U4.14
LRCK  (via drill 0.35)
  Top 0.305: U1.4 v39.79,62.45 | v21.96,23.68 21.96,22.21 U4.7
  Bottom 0.305: v39.79,62.45 32.29,62.45 18.59,48.76 13.29,48.76 11.58,47.04 11.58,34.06 v21.96,23.68
MISO  (via drill 0.35 pad 0.4)
  Top 0.2: U$2.SDDATA0 21.96,45.17
  Top 0.305: U1.14 37.93,49.7 v35.54,49.7 | 33.95,56.13 U$1.6 32.21,56.09 v32.17,56.13 | 21.96,45.17 v22.04,45.25 | v29.04,18.5 26.6,18.5 U$9.P$19
  Bottom 0.305: v29.04,18.5 35.54,25 v35.54,49.7 34.79,50.45 34.79,53.52 v32.17,56.13 32.17,55.36 22.04,45.23 v22.04,45.25
MOSI  (via drill 0.35 pad 0.4)
  Top 0.2: U$2.SDCMD 21.36,46.77 21.93,47.34 v23.04,47.34
  Top 0.305: U1.16 v36.29,47.21 | v32.17,57.4 33.95,57.4 U$1.7 | v29.04,16.5 26.6,16.5 U$9.P$20
  Bottom 0.305: v23.04,47.34 31.42,55.72 31.42,56.65 v32.17,57.4 35.54,54.03 35.54,50.71 36.29,49.96 v36.29,47.21 36.29,23.75 v29.04,16.5
N$1
  Top 0.305: SN74HCT245DWR.18 35.86,9.07 35.29,8.5 R9.1
N$2
  Top 0.305: C2.1 C4.1 18.14,20.5 18.74,21.1 U4.2
N$3
  Top 0.305: C22.1 11.69,17.1 10.95,17.84 C20.1 8.54,21.32 J1.3
N$4
  Top 0.305: C23.1 11.29,30.22 | 11.29,30.22 10.14,30.22 10.13,30.23 C21.1 10.14,31.18 10.14,31 | J1.2 10.14,29.75 10.14,29.94 | 10.14,29.94 10.14,30.5 | 10.14,30.5 10.14,31 | 11.29,30.22 11.02,30.49 | 11.02,30.49 10.51,31 10.14,31 | 11.02,30.49 10.69,30.49 | 10.69,30.49 10.15,30.49 10.14,30.5 | 10.14,29.94 10.69,30.49
N$5  (via drill 0.35 pad 0.4)
  Top 0.305: C1.1 v11.29,8.01 v11.29,8 12.29,7 U2.6 | v16.79,8 16.79,9.4 17.63,10.25 C8.1
  Bottom 0.305: v11.29,8 v16.79,8
N$6
  Top 0.305: SN74HCT245DWR1.12 35.98,30.7 35.79,30.5 R7.1
N$7
  Top 0.305: U3.2 17.92,5.63 18.79,6.5 26.96,6.5 28.29,5.17 R11.1
N$8
  Top 0.305: U3.5 17.92,2.12 18.34,1.7 25.49,1.7 26.29,2.5 R13.2
N$9
  Top 0.305: R10.2 38.08,2.71 38.54,2.25 39.74,2.25 U$7.P$3
N$10
  Top 0.305: SN74HCT245DWR1.18 35.86,23.07 35.29,22.5 R28.1
N$11
  Top 0.305: SN74HCT245DWR.15 35.92,12.88 35.54,12.5 R6.1
N$12
  Top 0.305: SN74HCT245DWR.14 35.88,14.15 35.54,14.5 R5.1
N$13
  Top 0.305: SN74HCT245DWR1.17 35.94,24.34 35.79,24.5 R27.1
N$14
  Top 0.305: SN74HCT245DWR.17 34.74,10.35 R8.1
N$15
  Top 0.305: SN74HCT245DWR1.15 36.17,26.89 35.79,26.5 R26.1
N$16
  Top 0.305: C22.2 R20.1
N$17
  Top 0.305: C15.2 C16.2 17.39,17.4 16.89,17.9 16.89,20.25 18.09,21.45 U4.1
N$18
  Top 0.2: U2.21 16.34,4.25 16.46,4.13 19.31,4.13 20.15,4.97 R14.1
N$19
  Top 0.508: U$1.1 33.98,48.28 C11.1 33.97,45.52 C18.1
N$20  (via drill 0.35 pad 0.4)
  Top 0.305: U$1.14 v32.04,66.25 | v28.04,71.75 R16.1
  Bottom 0.305: v32.04,66.25 28.04,70.25 v28.04,71.75
N$21
  Top 0.305: U$1.24 C12.1 22.58,54.3 22.04,53.75 20.54,53.75 19.29,55 19.29,57.25 20.84,58.8 U$3.1
N$22
  Top 0.305: U$1.23 22.63,56.09 C17.1 22.49,56.24 U$3.3
N$23
  Top 0.305: U$1.26 22.95,52.28 R17.1
N$24
  Top 0.305: C23.2 18.74,29.97 18.06,29.3 15.91,29.3 R21.1
N$25
  Top 0.305: U$1.27 23.01,51.02 R18.1
N$26
  Top 0.2: SN74HCT245DWR.11 37.12,17.96
  Top 0.305: SN74HCT245DWR.11 36.32,17.96 35.54,18.75 35.54,20 35.04,20.5 R29.1
N$27
  Top 0.305: SN74HCT245DWR1.14 36.13,28.16 35.79,28.5 R4.1
N$28
  Top 0.305: U2.9 10.79,4.75 9.91,3.88 R2.1
N$30
  Top 0.305: 20.69,28.75 U4.10 20.69,28.55 20.49,28.75 | 20.69,28.75 20.69,29.23 | 20.69,29.23 21.08,29.63 R19.1 | 19.79,28.75 19.64,28.75 19.39,28.5 U4.12 | 19.79,28.75 20.04,28.5 | 20.04,28.5 U4.11 20.04,28.75 | 19.79,28.75 20.04,28.75 | 20.04,28.75 20.29,28.75 | 20.69,28.75 20.49,28.75 | 20.49,28.75 20.29,28.75 | 20.29,28.75 20.04,28.5 | 20.29,28.75 20.29,28.83 20.69,29.23
N$31
  Top 0.305: C26.1 25.96,69.53 R23.2 27.68,69.47 R24.1
N$32
  Top 0.305: C19.1 21.19,63.48 R15.1 R22.2
N$34
  Top 0.305: SN74HCT245DWR.13 36.11,15.43 35.04,16.5 R30.1
N$35
  Top 0.305: SN74HCT245DWR.12 36.09,16.7 34.58,18.2 R25.1
RIGHT_CHANNEL
  Top 0.305: R20.2 15.54,24.5 15.79,24.75 17.29,24.75 18.74,26.2 U4.13 18.74,28.62 19.79,29.67 19.79,30.75 17.54,33 J3.1
RTS
  Top 0.305: U2.19 17.15,3.25 U3.4 17.27,1.77 17.84,1.2 26.66,1.2 28.29,2.83 R11.2
RX0  (via drill 0.35 pad 0.4)
  Top 0.305: U1.34 v52.04,61.18 | v24.98,4.67 24.69,4.97 R14.2
  Bottom 0.305: v52.04,61.18 46.61,55.75 39.54,55.75 39.04,55.25 39.04,21.5 24.98,7.45 v24.98,4.67 26.79,4.67 PAD4.1
SCK  (via drill 0.35 pad 0.4)
  Top 0.2: U$2.SDCLK 21.36,45.58 v22.29,46.5
  Top 0.305: U1.13 v36.54,51.02 | v32.17,58.67 33.95,58.67 U$1.8 | v29.04,14.5 26.6,14.5 U$9.P$21
  Bottom 0.305: 37.04,51.52 36.78,51.26 | 37.04,51.52 37.04,53.77 32.17,58.64 v32.17,58.67 30.67,57.17 30.67,55.94 22.29,47.56 v22.29,46.5 | v29.04,14.5 37.04,22.5 37.04,50 37.04,50.52 | 36.78,51.26 36.78,50.78 | 36.78,50.78 37.04,50.52 | 36.78,51.26 v36.54,51.02 36.78,50.78 | 37.04,51.52 37.04,50.52
SCKI  (via drill 0.35)
  Top 0.305: U4.6 21.34,23.32 v20.65,24 | U3.6 18.57,2.64 18.77,2.43 v19.54,2.43 | U1.25 v53.79,49.75
  Bottom 0.305: 23.04,3.75 PAD5.1 23.29,3 22.67,2.38 19.59,2.38 v19.54,2.43 19.54,22.88 v20.65,24 10.98,33.67 10.98,47.19 13.1,49.31 18.35,49.31 33.67,64.63 51.32,64.63 52.29,65.6 | v53.79,49.75 54.79,49.75 56.29,51.25 56.29,64.75 55.18,65.85 52.54,65.85 52.29,65.6 | 52.29,65.6 52.28,65.6
SD_CMD
  Top 0.2: U$2.CMD 18.51,46.77 17.84,47.45 J5.3
SD_CS  (via drill 0.35 pad 0.4)
  Top 0.2: U$2.SDDATA3 20.91,47.17 v21.99,48.25
  Top 0.305: U1.7 v36.29,58.64
  Bottom 0.305: v36.29,58.64 35.43,59.5 31.89,59.5 30.04,57.65 30.04,56.3 v21.99,48.25
SD_D0
  Top 0.2: U$2.DATA0 18.73,45.17 17.99,44.43 17.99,43.45 17.58,43.05 J5.7
SD_D1
  Top 0.2: U$2.DATA1 18.99,44.8 18.49,44.3 18.49,42.7 17.73,41.95 J5.8
SD_D2
  Top 0.2: U$2.DATA2 19.08,47.58 18.29,48.37 18.29,49 17.64,49.65 J5.1
SD_D3
  Top 0.2: U$2.DATA3 18.75,47.17 17.93,47.99 17.93,48.35 17.74,48.55 J5.2
SD_SCK
  Top 0.2: U$2.CLK 18.49,45.58 18.16,45.25 J5.5
TPIN+  (via drill 0.35 pad 0.4)
  Top 0.305: 29.09,67.85 v29.12,67.82 27.75,67.82 R24.2 | U$1.13 v31.79,64.98
  Bottom 0.305: P1.R7 18.54,61.7 19.29,62.45 19.29,63.75 24.16,68.62 28.32,68.62 v29.12,67.82 31.79,65.16 v31.79,64.98
TPIN-  (via drill 0.35 pad 0.4)
  Top 0.305: v24.67,67.82 24.74,67.88 R23.1 | U$1.12 31.48,63.72 31.04,64.16 v31.04,64.22
  Bottom 0.305: P1.R8 19.92,62.18 19.92,63.45 24.29,67.82 v24.67,67.82 27.92,67.82 31.04,64.71 v31.04,64.22
TPOUT+
  Top 0.305: U$1.17 23.5,63.72 23.29,63.5 R15.2 22.29,63.5 22.04,63.75 22.04,66 21.29,66.75 17.54,66.75 15.63,68.65 P1.R1
TPOUT-
  Top 0.305: U$1.16 23.55,64.98 23.26,65.28 R22.1 22.8,65.98 21.29,67.5 18.73,67.5 P1.R2
TX_CONTROLLER  (via drill 0.35)
  Top 0.2: R1.2 v20.29,3.2 19.92,3.2 19.37,3.75 U2.20
  Bottom 0.2: PAD3.1 20.74,3.2 v20.29,3.2
VDD3V3  (via drill 0.35, 0.35 pad 0.4)  (1 unrouted)
  Top 0.2: J5.4 16.67,46.38 U$2.VCC | v33.79,1.75 33.8,1.74
  Top 0.305: U$1.15 23.28,66.25 21.29,68.25 L1.1 | U$9.P$18 26.69,20.83 24.86,20.83 | 24.21,20.83 24.54,20.83 | 24.54,20.83 24.86,20.83 | v28.29,9.5 25.29,9.5 24.54,10.25 24.54,20.5 | 24.54,20.5 24.54,20.83 | J3.3 v14.79,35 | v33.79,1.75 35.04,1.75 35.29,2 R12.2 | 24.54,20.5 24.86,20.83 | 24.54,20.5 24.21,20.83 | 24.21,20.83 23.11,20.83 22.79,20.5 C14.1 C10.1 21.02,19.65 20.04,20.63 U4.4
  Top 0.508: 5V_TO_3V3_REGULATOR.2 32.04,37.5 | U1.2 36.8,64.99 v36.29,65.5 35.94,65.85 C27.1 36.04,68.1 36.04,70.66 C13.1 35.81,70.88 | U$9.P$17 28.32,22.55 v28.4,22.63 | J5.4 v14.54,46.35 | U$1.19 24.66,61.25 27.04,61.25 | v27.54,61.25 27.04,61.25 | v27.54,61.25 27.54,60.75 | 27.54,60.75 27.54,60.41 | 27.54,60.41 27.54,60 | 27.54,60 27.54,59.5 | 27.54,59.5 27.54,59.41 | 27.54,59.41 27.54,54 | 27.54,53.61 27.54,53.5 | 27.54,53.5 27.54,53.05 | 27.54,50.25 27.54,53.05 | U$1.15 26.03,66.25 27.54,64.75 27.54,61.75 | 27.54,61.75 v27.54,61.25 | U$1.28 27.04,49.75 | C6.1 36.78,38 32.54,38 | U$1.20 27.04,59.91 | 27.13,59.91 27.44,59.91 27.54,60 | U$1.25 27.04,53.55 | 27.48,53.55 27.04,53.55 | 27.48,53.55 27.54,53.5 | 27.04,53.55 27.54,53.05 | 27.48,53.55 27.54,53.61 | 27.54,53.61 27.54,54 | 27.04,53.55 27.48,54 27.54,54 | 27.04,49.75 27.54,50.25 | 27.54,50.25 v27.54,49.75 27.04,49.75 | 27.04,61.25 27.54,60.75 | 27.04,61.25 27.54,61.75 | 27.04,59.91 27.13,59.91 | 27.13,59.91 27.54,59.5 | 27.04,59.91 27.54,60.41 | 27.04,59.91 27.54,59.41 | 32.04,37.5 32.54,38 | 32.54,38 v32.04,38 32.04,37.5
  Top 1.016: U$9.P$17 U$9.P$18
  Bottom 0.2: PAD1.1 32.79,2.75
  Bottom 0.305: 32.79,2.75 v33.79,1.75 | PAD1.1 32.79,6 29.29,9.5 v28.29,9.5 | v14.79,35 19.88,35 22.58,37.7 | 22.58,37.7 22.58,38.3 22.46,38.42 | 22.88,38 22.58,37.7
  Bottom 0.508: v32.04,38 32.04,37.5 | 32.04,37.5 32.04,26.26 v28.4,22.63 | v36.29,65.5 33.54,65.5 29.29,61.25 v27.54,61.25 | v27.54,49.75 32.04,45.25 32.04,38.5 | 32.04,38.5 v32.04,38 | v32.04,38 31.54,38 | 31.54,38 22.88,38 22.46,38.42 v14.54,46.35 | 31.54,38 32.04,38.5 | 31.54,38 32.04,37.5
VDD3V3_BRD  (1 unrouted)
VDD5V  (via drill 0.35, 0.35 pad 0.4)
  Top 0.305: v20.75,17.35 20.34,17.35 19.44,18.25 C2.2 C4.2 19.39,19.8 U4.3 | D2.C 17.62,14.08 16.54,13 v16.54,12.25 | v11.29,1.39 10.72,1.96 R2.2 | 36.04,34.73 36.49,34.28 36.82,34.28 | 34.43,34.73 C3.1 | 50.24,11 50.24,10 | 50.54,10 C24.1 50.74,10 50.49,10.25
  Top 0.508: 52.69,20.5 C5.1 | C5.1 50.79,20.55 | 50.79,20.55 49.79,20.55 | 49.79,20.55 46.74,20.55 | C5.1 52.74,24.34 C9.1 | 46.74,20.55 46.29,20.55 | 46.29,20.55 45.54,20.55 45.06,21.02 | 50.24,10.75 50.24,10 50.54,10 50.99,10 | 50.24,10.75 50.24,11 50.24,20 | 50.24,20.25 50.24,20 | 50.49,10.25 50.49,10.2 48.79,8.5 48.79,7.29 48.04,6.54 SN74HCT245DWR.1 SN74HCT245DWR.20 | C25.1 53.24,13.29 C24.1 50.99,10 | 34.67,34.97 5V_TO_3V3_REGULATOR.3 34.43,34.73 36.04,34.73 36.29,34.73 | 45.06,21.02 44.56,21.52 | 44.56,21.52 43.29,22.8 43.29,29.75 38.35,34.68 37.22,34.68 36.82,34.28 | 36.82,34.28 36.54,34 | 36.54,34 35.07,32.53 27.57,32.53 26.54,31.5 U$9.P$13 | v20.75,17.35 20.75,14.63 20.2,14.08 D2.C | 50.24,10.75 50.99,10 | v28.54,28.5 26.58,28.5 U$9.P$14 | SN74HCT245DWR1.1 46.74,20.55 | SN74HCT245DWR1.20 44.54,20.54 | 44.54,20.54 46.27,20.54 46.29,20.55 | 45.06,21.02 45.03,21.02 44.54,20.54 | 44.54,20.54 44.54,21.5 44.56,21.52 | 36.52,34.73 C3.1 36.82,34.43 | 36.52,34.73 36.29,34.73 | 36.82,34.43 36.52,34.73 | 36.82,34.43 36.82,34.28 | 36.52,34.73 36.52,34.5 | 36.52,34.5 36.52,34.02 36.54,34 | 36.29,34.73 36.52,34.5 | 50.24,20 50.79,20.55 | 50.24,20 49.79,20.45 49.79,20.55
  Top 1.016: U$9.P$14 U$9.P$13
  Bottom 0.2: 11.31,1.37 v11.29,1.39
  Bottom 0.305: v16.54,12.25 16.54,10.25 18.04,8.75 18.04,2.62 16.79,1.37 11.31,1.37
  Bottom 0.508: v28.54,28.5 24.75,24.71 24.75,21.35 v20.75,17.35
VDD5V_BRD  (17 unrouted)
  pour Bottom (no thermals): 57.5,133.17 0,133.17 0,76.42 57.5,76.42
VDD5VUSB  (via drill 0.35 pad 0.4)
  Top 0.305: J2.B9 7.73,15.44 7.98,15.69 J2.A4 v10.19,15.69 | J2.B4 7.64,12.94 7.89,12.69 J2.A9 | 9.1,12.69 J2.A9 | U2.8 v10.19,5.25 | J2.A9 10.16,12.69 v10.19,12.7 | v12.54,12.7 13.04,12.19 D1.2
  Top 0.508: D2.A 13.91,14.08 v13.9,14.1 12.31,15.69 v10.19,15.69
  Bottom 0.305: 13.9,14.06 v13.9,14.1
  Bottom 0.508: 13.9,14.06 v12.54,12.7 10.74,12.7 | 10.74,12.7 v10.19,12.7 | v10.19,15.69 10.19,13.25 | 10.19,13.25 v10.19,12.7 | v10.19,12.7 10.19,12.15 | v10.19,5.25 10.19,12 10.19,12.15 | 10.19,13.25 10.74,12.7 | 10.74,12.7 10.19,12.15
(copper drawn outside any net)
  shapes: Top area x3